# Altium PCB PCB1.PcbDoc
Units mm, origin at the board's own origin, x right, y up, seen from the top; angles counter-clockwise.
Board outline 100 x 50 mm, 2 copper layers (Top Layer, Bottom Layer); 39 components, 30 nets, 103 pads, 25 vias.
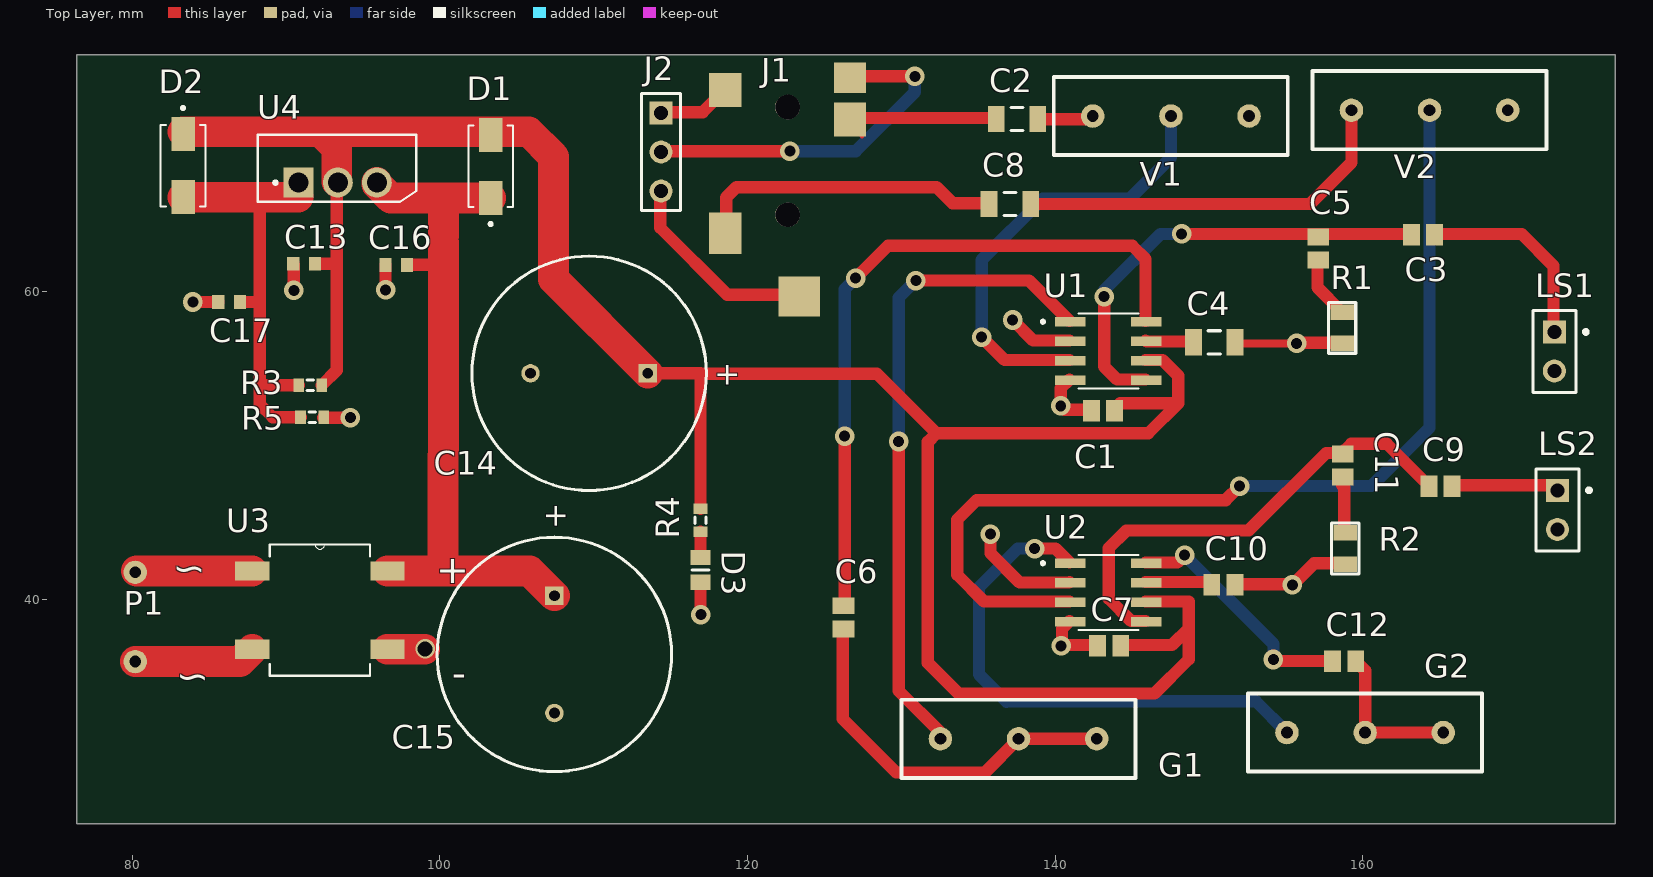
[diagram p0: Top Layer view]
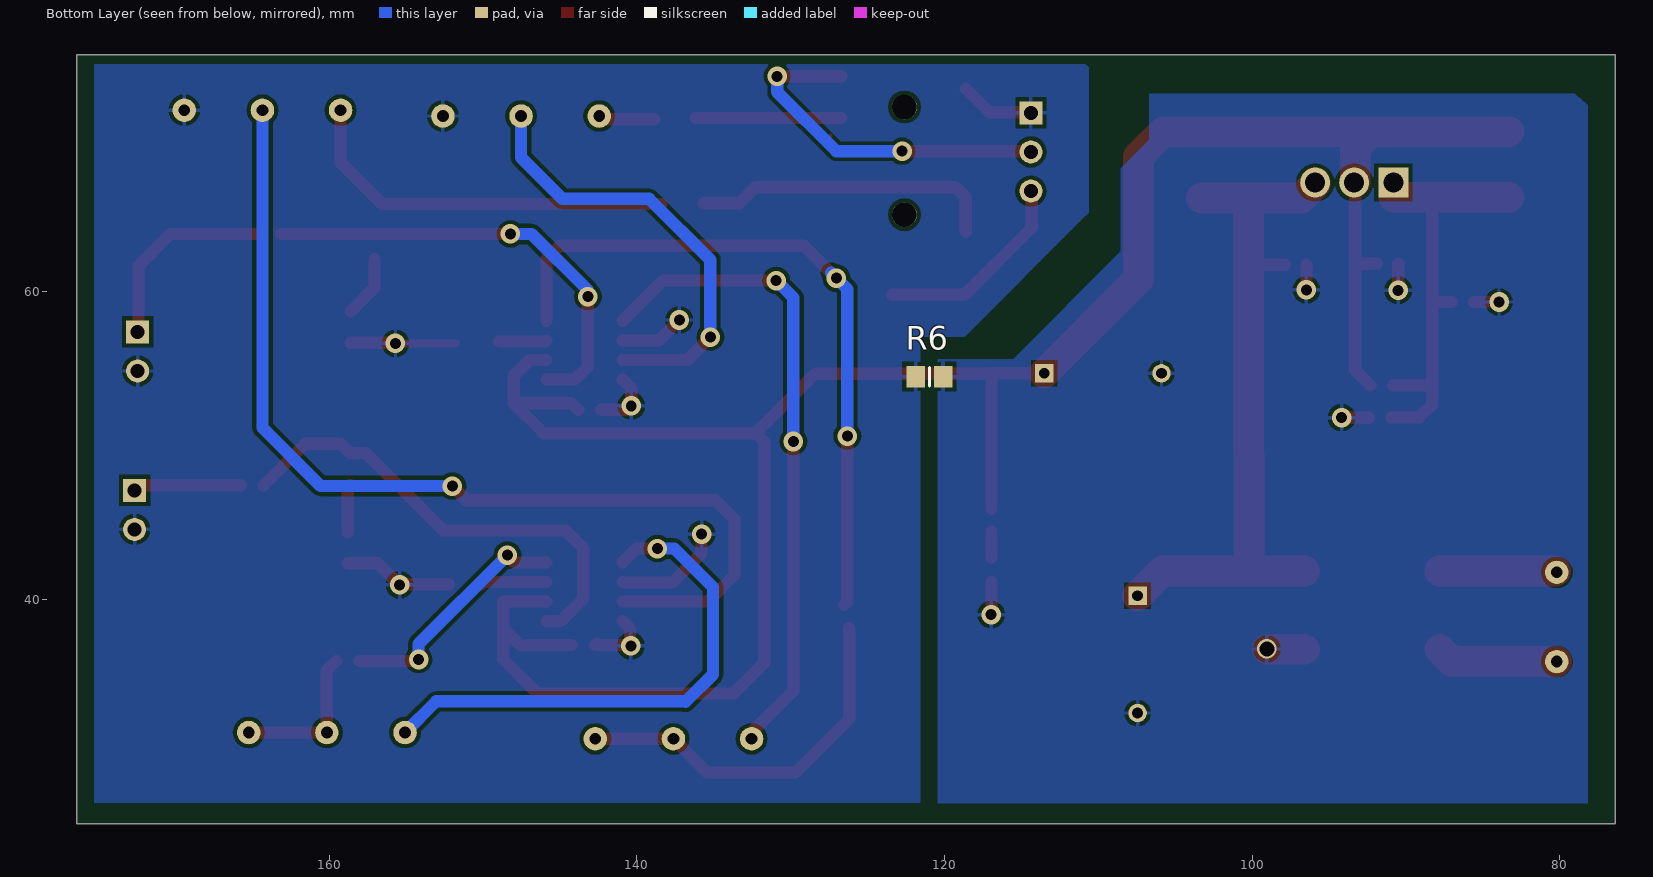
[diagram p1: Bottom Layer view, seen from below]

## Layer stack, top to bottom
Top Solder: solder mask 0.0102, Solder Resist, Dk 3.5
Top Layer: signal copper 0.0356
Dielectric 1: dielectric 0.32, FR-4, Dk 4.8
Bottom Layer: signal copper 0.0356
Bottom Solder: solder mask 0.0102, Solder Resist, Dk 3.5

## Board outline
76.4,25.4 176.4,25.4 176.4,75.4 76.4,75.4

## Design rules (kind name [scope] priority, off if disabled: settings)
Clearance Plnaes [All] p1: gap=0.254 ignorepadtopadclearanceinfootprint=FALSE except(0: Arc-Hole Track-Hole SMDPad-Hole THPad-Hole Via-Hole Fill-Hole Poly-Hole Region-Hole Text-Hole)
ComponentClearance [All] p1 off: gap=0.254 collisioncheckmode=3 verticalgap=0.254 showdistances=FALSE
PolygonConnect [All] p1: connectstyle=Relief reliefconductorwidth=0.254 reliefentries=4 polygonreliefangle="90 Angle" airgapwidth=0.254
RoutingVias [All] p1: holewidth=0.711 width=1.27 viastyle="Through Hole" minholewidth=0.711 minwidth=1.27 maxholewidth=0.711 maxwidth=1.27
SolderMaskExpansion [All] p1: expansion=0.102
UnpouredPolygon [All] p1: allowunpoured=TRUE allowshelved=TRUE
Width [All] p1: maxlimit=2 minlimit=0.5 preferedwidth=0.8 minimp=50.000000 maximp=50.000000 favimp=50.000000
28 further rules are at their usual default settings.

## Classes and differential pairs
component class Power_Supply: C1 C13 C14 C16 C17 D1 D2 D3 P1 R3 R4 R5 R6 U3 U4
component class LM386: C2 C3 C4 C5 C6 C7 C8 C9 C10 C11 C12 C17 G1 G2 J1 J2 LS1 LS2 R5 R6 U1 U2 V1 V2

## Components (designator, comment, footprint, x,y, rotation, side; value= is the part's Value field where it differs from the comment)
C1 "Cap Semi" C0805 143.104,52.273 r0 top value=100n
C2 "Cap Semi" C1206 137.516,71.222 r180 top value=220nF
C3 "Cap Pol3" C0805 163.906,63.703 r0 top value=220uF
C4 "Cap Semi" C1206 150.343,56.718 r180 top value=10uF
C5 "Cap Semi" C0805 157.099,62.814 r270 top value=47nF
C6 "Cap Semi" C0805 126.238,38.837 r270 top value=10uF
C7 "Cap Semi" C0805 143.51,36.982 r0 top value=100n
C8 "Cap Semi" C1206 137.058,65.71 r180 top value=220nF
C9 "Cap Pol3" C0805 165.049,47.371 r0 top value=220uF
C10 "Cap Semi" C0805 150.927,40.945 r180 top value=10uF
C11 "Cap Semi" C0805 158.699,48.717 r270 top value=47nF
C12 "Cap Semi" C0805 158.787,35.992 r0 top value=10uF
C13 "Cap Semi" 1608[0603] 91.175,61.824 r0 top value=1uF
C14 "Cap Pol1" RB7.6-15 109.7,54.7 r0 top value=1000uF/35V
C15 "Cap Pol1" RB7.6-15 107.442,36.424 r90 top value=1000uF/35V
C16 "Cap Semi" 1608[0603] 97.166,61.747 r0 top value=0.1uF
C17 "Cap Semi" 1608[0603] 86.298,59.334 r0 top value=10uF
D1 "S1BB-13-F" DIOM505270X240 103.3,68.15 r90 top
D2 "S1BB-13-F" DIOM505270X240 83.3,68.2 r270 top
D3 "LED3" 6-0805_L 116.942,41.923 r270 top
G1 "RPot" "PCBComponent_1 - duplicate" 142.697,30.937 r180 top value=10K
G2 "RPot" "PCBComponent_1 - duplicate" 165.227,31.344 r180 top value=10K
J1 "35RASMT4BHNTRX" SWITCHCRAFT_35RASMT4BHNTRX 122.606,68.259 r270 top
J2 "Header 3" HDR1X3 114.376,71.628 r270 top
LS1 "Speaker" PIN2 172.451,57.389 r270 top
LS2 "Speaker" PIN2 172.651,47.089 r270 top
P1 "External Trafo Used" PCBComponent_1 80.188,35.958 r90 top
R1 "Res3" SMD-0805-RES 158.648,57.658 r180 top value=10
R2 "Res3" SMD-0805-RES 158.852,43.307 r180 top value=10
R3 "Res1" J1-0603 91.567,53.924 r180 top value=1K
R4 "Res3" J1-0603 116.942,45.149 r270 top value=1K
R5 "Res3" J1-0603 91.694,51.841 r180 top value=6.2K
R6 "Res3" 6-0805_N 120.98,54.483 r180 bottom value=0
U1 "LM386M-1/NOPB" SOIC127P600X175-8N 143.451,56.149 r0 top
U2 "LM386M-1/NOPB" SOIC127P600X175-8N 143.451,40.449 r0 top
U3 "DF01S2" SOT508P985X260-4N 92.2,39.3 r180 top
U4 "LM317T" TO254P460X1020X1945-3P 93.36,67.049 r90 top
V1 "RPot" "PCBComponent_1 - duplicate" 152.603,71.425 r180 top value=10K
V2 "RPot" "PCBComponent_1 - duplicate" 169.418,71.806 r180 top value=10K

## Footprints (in the part's own frame and the unit in brackets; to place one, negate y for a bottom-side part, rotate by r counter-clockwise, add the part's x,y. Pads: shape width x height; smd on the part's side, far side on the other; paste and mask are expansions set on the pad)
6-0805_L [mm] "Chip Resistor, Body 2.0x1.2mm, IPC High Density"
  rect 1x1.3 smd: 1(-0.8,0) 2(0.8,0)
  silkscreen extent 0,-0.55 0,0.55, body extent -1.07,-0.7 1.07,0.7, height 0.7
6-0805_N [mm] "Chip Resistor, Body 2.0x1.2mm, IPC Medium Density"
  rect 1.2x1.4 smd: 1(-0.9,0) 2(0.9,0)
  silkscreen extent 0,-0.6 0,0.6, body extent -1.07,-0.7 1.07,0.7, height 0.7
1608[0603] [mm] "Chip Capacitor, Body 1.6x0.8mm, IPC High Density"
  rect 0.8x0.9 smd: 1(-0.7,0) 2(0.7,0)
  body extent -0.87,-0.48 0.87,0.48, height 1.3
C0805 [mm] "Chip Capacitor, Body 2.0x1.3mm, IPC High Density"
  rect 1.1x1.4 smd: 1(-0.75,0) 2(0.75,0)
  body extent -1.1,-0.72 1.1,0.72, height 1.4
C1206 [mm] "Chip Capacitor, Body 3.2x1.6mm, IPC High Density"
  rect 1.1x1.7 smd: 1(-1.35,0) 2(1.35,0)
  silkscreen extent -0.4,-0.75 0.4,0.75, body extent -1.7,-0.9 1.7,0.9, height 1.3
DIOM505270X240 [mm]
  rect 2.21x1.53 smd: A(2.05,0) C(-2.05,0)
  silkscreen extent -3.85,-1.45 2.65,1.45
HDR1X3 [mm] "Connector; Header; 3 Position"
  rect 1.5x1.5 hole 0.9: 1(0,0)
  round 1.5 hole 0.9: 2(2.54,0) 3(5.08,0)
  silkscreen extent -1.27,-1.27 6.35,1.27
J1-0603 [mm] "Chip Resistor, Body 1.6x0.8mm, IPC High Density"
  rect 0.7x0.9 smd: 1(-0.75,0) 2(0.75,0)
  silkscreen extent -0.2,-0.35 0.2,0.35, body extent -0.85,-0.48 0.85,0.48, height 0.9
PCBComponent_1 [mil]
  round 60 hole 30: 1(0,0) 2(228.35,0)
"PCBComponent_1 - duplicate" [mil]
  round 60 hole 30: 1(0,0) 2(200,0) 3(400,0)
  silkscreen extent -99,-100 500,100
PIN2 [mm] "Photosensitive Diode; 2 Leads"
  rect 1.5x1.5 hole 0.9: 1(0,0)
  round 1.5 hole 0.9: 2(2.54,0)
  silkscreen extent -1.4,-1.4 3.94,2.18
RB7.6-15 [mm] "Polarized Capacitor (Radial); 2 Leads"
  rect 1.2x1.2 hole 0.7: 1(3.81,0)
  round 1.2 hole 0.7: 2(-3.81,0)
  silkscreen extent -7.62,-7.62 7.62,7.62
SMD-0805-RES [mil]
  rect 60x40 smd: 1(0,40) 2(0,-40)
  silkscreen extent -35,-65 35,65, body extent -24,-39 26,39, height 31
SOIC127P600X175-8N [mm]
  rect 1.97x0.6 smd: 1(-2.475,1.905) 2(-2.475,0.635) 3(-2.475,-0.635) 4(-2.475,-1.905) 5(2.475,-1.905) 6(2.475,-0.635) 7(2.475,0.635) 8(2.475,1.905)
  silkscreen extent -4.35,-2.45 1.95,2.45
SOT508P985X260-4N [mil]
  rect 88x49 smd: 1(-173,-100) 2(-173,100) 3(173,100) 4(173,-100)
  silkscreen extent -128,-168 128,168
SWITCHCRAFT_35RASMT4BHNTRX [mm]
  rect 2.2x2.1 smd: 1(-4.85,-4.05) 2(-2.95,4.05)
  rect 2.7x2.1 smd: 3(4.45,-4.048)
  rect 2x2.1 smd: 4(-5.65,4.05)
  rect 2.6x2.7 smd: 5(8.553,0.748)
  round 1.6 hole 1.6 unplated: None(-3.75,0) None(3.25,0)
TO254P460X1020X1945-3P [mm]
  rect 1.95x1.95 hole 1.3: 1(0.051,2.54)
  round 1.95 hole 1.3: 2(0.051,0) 3(0.051,-2.54)
  silkscreen extent -1.2,-5.1 3.15,5.21

## Part data
C1 C2 C4 C5 C6 C7 C8 C10 C11 C12 C13 C16 C17: "Capacitor (Semiconductor SIM Model)", LatestRevisionDate=29-May-2009, LatestRevisionNote="IPC-7351 Footprint Added.", PackageDescription="Chip Capacitor", Published=8-Jun-2000, Publisher="Altium Limited"
  C1 C5 C7 C11: PackageReference=C1206, PN=C0805C473K3RACTU
  C2 C8: PackageReference=C1206, PN=C0805C223K3RACTU
  C4 C6 C12 C13 C16 C17: PackageReference=C1206
  C10: PackageReference=C0805, PN=GRM32DR71E106KA12L
C3 C9: "Polarized Capacitor (Surface Mount)", LatestRevisionDate=29-May-2009, LatestRevisionNote="IPC-7351 Footprint Added.", PackageDescription="Chip Capacitor", PackageReference=C0805, Published=8-Jun-2000, Publisher="Altium Limited"
C14 C15: "Polarized Capacitor (Radial)", LatestRevisionDate=17-Jul-2002, LatestRevisionNote="Re-released for DXP Platform.", PackageDescription="Polarized Capacitor (Radial); 2 Leads", PackageReference=RB7.6-15, PN=EEU-FS1V102LB, Published=8-Jun-2000, Publisher="Altium Limited"
D1 D2: library part "Diode 1N4002", "100V 1 Amp General Purpose Rectifier", Supplier Part Number 1=621-S1BB-F, Code_JEDEC=DO-204-AL, ComponentLink1Description="Manufacturer Link", ComponentLink1URL=http://www.fairchildsemi.com/, ComponentLink2Description=Datasheet, ComponentLink2URL=http://www.fairchildsemi.com/ds/1N%2F1N4001.pdf, DatasheetVersion=1998, LatestRevisionDate=17-Jul-2002, LatestRevisionNote="Re-released for DXP Platform.", PackageDescription="Diode, Axial; Body 5.2 x 2.7 mm (LxDia. max), Lead Dia. 0.86 mm (max)", PackageReference=DO-41, PackageVersion=Aug-1999, Published=8-Jun-2000, Publisher="Altium Limited", Supplier 1=Mouser
D3: "Typical BLUE SiC LED", DatasheetVersion=16-Apr-2002, LatestRevisionDate=17-Dec-2003, LatestRevisionNote="PCB Footprint replaced.", PackageDescription="SM LED; 2 C-Bend Leads; Body 3.5 x 2.8 x 1.9 mm, inc leads (LxWxH typ)", PackageReference=3.5X2.8X1.9, PackageVersion=16-Apr-2002, PN=SML-H12U8TT86C, Published=8-Jun-2000, Publisher="Altium Limited"
G1 G2 V1 V2: "Potentiometer", LatestRevisionDate=17-Jul-2002, LatestRevisionNote="Re-released for DXP Platform.", PackageDescription="Variable Resistor, Thru-Hole; 3 Leads", PackageReference=VR5, Published=8-Jun-2000, Publisher="Altium Limited", Set Position=0.5, Sim Note="Enter the Resistance value and the set point into parameter fields."
J1: "Conn 3.5MM Stereo Jack F 3 POS Solder RA SMD 5 Terminal 1 Port T/R", Package=None, Supplier Part Number 1=7051490, Availability=Unavailable, MF=Switchcraft, MP=35RASMT4BHNTRX, Price=None, SnapEDA_Link=https://www.snapeda.com/parts/35RASMT4BHNTRX/Switchcraft%20Inc./view-part/?ref=snap, Supplier 1=RSComponents
J2: "Header, 3-Pin", LatestRevisionDate=17-Jul-2002, LatestRevisionNote="Re-released for DXP Platform.", Publisher="Altium Limited"
LS1 LS2: "Loudspeaker", LatestRevisionDate=17-Jul-2002, LatestRevisionNote="Re-released for DXP Platform.", PackageReference=PIN2, Published=24-Mar-1999, Publisher="Altium Limited"
P1: library part MHDR1X2, "Header, 2-Pin", LatestRevisionDate=17-Jul-2002, LatestRevisionNote="Re-released for DXP Platform.", Publisher="Altium Limited"
R1 R2 R3 R4 R5 R6: "Resistor", Published=8-Jun-2000, Publisher="Altium Limited"
  R1 R2 R4 R5 R6: LatestRevisionDate=29-May-2009, LatestRevisionNote="IPC-7351 Footprint Added.", PackageDescription="Chip Resistor", PackageReference=J1-0603
  R3: LatestRevisionDate=17-Jul-2002, LatestRevisionNote="Re-released for DXP Platform.", PackageDescription="Axial Device, Thru-Hole; 2 Leads; 0.3 in Pin Spacing", PackageReference=AXIAL-0.3
U1 U2: "Wide Input Voltage Low Power Audio Amplifier with Internal Gain 8-SOIC 0 to 70", Package="SOIC-8 Texas Instruments", Supplier Part Number 1=536-1366, Availability=Good, MF="Texas Instruments", MP=LM386M-1, Price="0.76 USD", SnapEDA_Link=https://www.snapeda.com/parts/LM386M-1/Texas%20Instruments/view-part/?ref=snap, Supplier 1=RSComponents
U3: library part DF01S, "DF01S Series 1.5 A 100 V 5 uA Surface Mount Bridge Rectifier -SDIP-4", Package="SMD-4 ON Semiconductor", Digi-Key_Part_Number=DF01SDI-ND, Digi-Key_Purchase_URL=https://www.digikey.es/product-detail/en/diodes-incorporated/DF01S/DF01SDI-ND/149499?utm_source=snapeda&utm_medium=aggregator&utm_campaign=symbol, MF="ON Semiconductor", MP=DF01S, SnapEDA_Link=https://www.snapeda.com/parts/DF01S/ON%20Semiconductor/view-part/?ref=snap
U4: Package="TO-220-3 HTC Korea", Availability=Unavailable, MF="Texas Instruments", MP=LM317T, Price=None, SnapEDA_Link=https://www.snapeda.com/parts/LM317T/Texas%20Instruments/view-part/?ref=snap

## Via types
v1: diameter 1.27, hole 0.711, Top Layer to Bottom Layer, 24 vias
v2: diameter 1.27, hole 1, Top Layer to Bottom Layer, 1 vias

## Nets (pads, with @x,y where several pads share a name; then routed paths per layer and width w, separated by ;. In a path a pad name is that pad's centre, name@x,y a point inside that pad or via, vN(x,y) a via of type N, cw(c..) or ccw(c..) an arc to the next point about the centre after c; other vN are vias at no path point)
9V: C1.2 C7.2 C13.2 C14.1 D1.A D2.C R3.1 R4.1 U1.6 U2.6 U4.2 | length 160.3
  Top Layer w0: 93.249,63.271 93.3,63.322
  Top Layer w0.254: D2.C D2.C@83.3,70.4 ; 93.3,70.1 93.4,70.2
  Top Layer w0.8: C13.2 93.249,61.824 93.3,61.874 ; R3.1 93.3,54.907 93.3,61.874 ; U4.2@93.3,67.16 93.3,63.322 93.3,61.874 ; C14.1 116.916,54.7 ; R4.1 116.942,54.675 128.409,54.675 132.283,50.8 ; C1.2@143.803,52.324 144.235,52.756 148.006,52.756 ; C7.2@144.209,37.033 147.587,37.033 148.679,38.125 ; U2.6@145.875,39.865 148.679,39.865 148.679,38.125 ; U1.6@145.875,55.565 146.975,55.565 148.006,54.534 148.006,52.756 ; 148.679,36.093 148.679,36.106 ; 132.283,50.8 131.724,50.241 131.724,35.865 133.706,33.884 146.456,33.884 148.679,36.106 ; 132.283,50.8 146.05,50.8 148.006,52.756 ; 148.679,36.106 148.679,38.125
  Top Layer w2: D2.C@83.3,70.4 92.228,70.4 ; U4.2@93.3,67.16 93.3,69.328 92.228,70.4 ; C14.1 107.391,60.819 107.391,68.783 105.774,70.4 103.1,70.4 92.228,70.4
"230 -18": P1.2 U3.4 | length 7.7
  Top Layer w0.254: P1.2 P1.2@80.27,41.84
  Top Layer w2: P1.2@80.27,41.84 U3.4
Ajuste: C17.2 D2.A R3.2 R5.2 U4.1 | length 28.8
  Top Layer w0.254: D2.A@83,66.2 83.1,66.2 83.15,66.15 D2.A ; 90.3,65.68 U4.1@90.77,66.15
  Top Layer w0.8: C17.2 88.279,59.334 ; 88.29,59.346 88.279,59.334 ; 88.367,66.15 88.279,66.063 88.279,59.334 ; R3.2 88.305,53.924 88.279,53.899 ; R5.2 89.129,51.841 88.279,52.691 88.279,53.899 ; 88.279,53.899 88.279,59.334
  Top Layer w2: D2.A 88.367,66.15 U4.1@90.77,66.15
Derecha: C2.2 J1.2 | length 9.5
  Top Layer w0.254: J1.2@127.4,70.15 127.45,70.1
  Top Layer w0.8: J1.2@126.707,71.301 C2.2@136.166,71.301
GND-ANA: C1.1 C4.1 C7.1 C10.1 J1.1 J2.1 LS1.2 LS2.2 R1.1 R2.1 R6.1 U1.2 U1.4 U2.2 U2.4 V1.1 V2.1 | length 38.7
  Top Layer w0.254: C4.1@151.642,56.769 C4.1@151.769,56.642 ; v1@155.372,40.996 v1(155.423,40.945)
  Top Layer w0.5: C4.1@151.769,56.642 v1@155.6,56.642
  Top Layer w0.8: J2.1@114.325,71.679 117.084,71.679 J1.1@118.607,73.201 ; v1(135.788,44.247) 135.788,43.002 137.687,41.104 140.894,41.104 U2.2@140.925,41.135 ; v1(137.236,58.166) 138.567,56.835 U1.2@140.925,56.835 ; U2.4@140.925,38.595 140.437,38.107 140.437,37.033 142.709,37.033 C7.1@142.604,37.138 ; U1.4@140.925,54.295 140.36,53.73 v1(140.36,52.578) 140.614,52.324 C1.1@142.303,52.324 ; C10.1@152.226,40.996 v1@155.372,40.996 ; v1(155.423,40.945) 156.82,42.342 R2.1@158.801,42.342 ; v1@155.6,56.642 155.651,56.693 R1.1@158.598,56.693
  other v1: 140.386,36.982 155.69,56.642
GND-PWR: C13.1 C14.2 C15.2 C16.1 C17.1 D3.2 R5.1 R6.2 U3.2 | length 11.4
  Top Layer w0: v2@99.015,36.76 v2(99.035,36.779)
  Top Layer w0.8: v1(83.947,59.334) C17.1 ; C13.1 90.5,61.798 v1(90.5,60.096) ; R5.1 92.419,51.816 v1(94.183,51.816) ; v1(96.466,60.122) C16.1 ; D3.2 116.942,39.04 v1(116.967,39.014)
  Top Layer w2: U3.2 v2@99.015,36.76
Izquierda: C8.2 J1.3 | length 20
  Top Layer w0.8: J1.3@118.609,63.901 118.609,66.132 119.278,66.802 132.283,66.802 133.325,65.761 C8.2@135.658,65.761
NetC2_1: C2.1 V1.3 | length 3.7
  Top Layer w0.8: C2.1 142.24,71.222 V1.3
NetC3_1: C3.1 C5.1 U1.5 | length 29.4
  Top Layer w0.8: v1(143.18,59.69) 143.18,55.143 144.028,54.295 U1.5@145.875,54.295 ; v1(148.213,63.758) 157.048,63.758 157.052,63.754 C3.1@163.105,63.754
  Bottom Layer w0.8: v1(143.18,59.69) 143.18,60.096 146.841,63.758 v1(148.213,63.758)
NetC3_2: C3.2 LS1.1 | length 12.9
  Top Layer w0.8: C3.2@164.605,63.754 170.332,63.754 172.4,61.686 LS1.1@172.4,57.44
NetC4_2: C4.2 U1.7 | length 3.2
  Top Layer w0.254: C4.2@148.876,56.835 C4.2@148.942,56.769
  Top Layer w0.8: U1.7@145.875,56.835 145.941,56.769 C4.2@148.942,56.769
NetC5_2: C5.2 R1.2 | length 4
  Top Layer w0.8: C5.2@157.048,62.115 157.048,60.274 R1.2@158.598,58.725
NetC6_1: C6.1 U1.8 | length 46.2
  Top Layer w0.8: v1(126.314,50.622) 126.314,39.841 C6.1@126.517,39.637 ; v1(127.025,60.884) 129.134,62.992 145.009,62.992 145.875,62.126 U1.8@145.875,58.105
  Bottom Layer w0.8: v1(126.314,50.622) 126.314,60.173 v1(127.025,60.884) v1@127.381,61.239
NetC6_2: C6.2 G1.1 G1.2 | length 24.8
  Top Layer w0.8: C6.2@126.187,38.137 126.187,32.233 129.667,28.753 135.433,28.753 G1.2 G1.1
NetC8_1: C8.1 V2.3 | length 25.4
  Top Layer w0.8: C8.1 156.566,65.71 159.258,68.402 V2.3
NetC9_1: C9.1 C11.1 U2.5 | length 31
  Top Layer w0.8: U2.5@145.875,38.595 144.935,38.595 143.485,40.046 143.485,43.332 144.628,44.475 152.578,44.475 157.62,49.518 158.648,49.518 159.248,50.118 161.552,50.118 C9.1@164.248,47.422
NetC9_2: C9.2 LS2.1 | length 7
  Top Layer w0.8: C9.2@165.748,47.422 172.318,47.422 LS2.1@172.6,47.14
NetC10_2: C10.2 U2.7 | length 4.3
  Top Layer w0.8: U2.7@145.875,41.135 149.987,41.135 C10.2@150.126,40.996
NetC11_2: C11.2 R2.2 | length 3.1
  Top Layer w0.8: C11.2@158.648,47.418 158.801,47.266 R2.2@158.801,44.374
NetC12_1: C12.1 U2.8 | length 16.1
  Top Layer w0.8: U2.8@145.875,42.405 147.942,42.405 v1(148.412,42.875) ; v1@154.19,36.335 v1(154.19,36.093) 154.19,35.992 C12.1
  Bottom Layer w0.8: v1(148.412,42.875) 154.19,37.097 v1(154.19,36.093)
NetC12_2: C12.2 G2.1 G2.2 | length 10
  Top Layer w0.8: C12.2 160.147,35.382 G2.2 G2.1
NetC15_1: C15.1 C16.2 D1.C U3.1 U4.3 | length 46
  Top Layer w0.8: C16.2 99.692,61.747 ; 99.619,62.586 100.225,63.192
  Top Layer w2: U4.3 95.9,66.99 96.799,66.091 100.225,66.091 100.225,66.021 ; U3.1 100.33,41.84 ; 100.225,63.192 100.225,57.099 100.2,41.97 100.33,41.84 ; 100.225,63.627 100.225,66.021 ; D1.C 100.305,66.1 100.225,66.021 ; C15.1 105.836,41.84 100.33,41.84
NetD3_1: D3.1 R4.2 | length 1.7
  Top Layer w0.8: D3.1 R4.2
NetG1_2: G1.3 U1.1 | length 42.5
  Top Layer w0.8: v1(129.819,50.267) 129.819,34.061 132.537,31.344 G1.3 ; v1(130.937,60.731) 138.299,60.731 ; 138.303,60.731 138.299,60.731 ; U1.1@140.925,58.105 138.299,60.731
  Bottom Layer w0.8: v1(129.819,50.267) 129.819,59.614 v1(130.937,60.731)
NetG2_2: G2.3 U2.1 | length 34.6
  Top Layer w0.8: v1(138.659,43.307) 140.023,43.307 U2.1@140.925,42.405
  Bottom Layer w0.8: v1(138.659,43.307) 137.566,43.307 135.052,40.792 135.052,35.128 136.83,33.35 136.855,33.376 153.035,33.376 G2.3
NetJ1_4: J1.4 J2.2 | length 23.3
  Top Layer w0.8: J2.2@114.325,69.139 v1(122.758,69.139) ; J1.4@126.707,74.001 v1(130.875,74.001)
  Bottom Layer w0.8: v1(122.758,69.139) 127.025,69.139 130.875,72.988 v1(130.875,74.001)
NetJ1_5: J1.5 J2.3 | length 13.3
  Top Layer w0.8: J2.3@114.325,66.599 114.325,64.16 118.687,59.799 J1.5@123.405,59.799
NetP1_1: P1.1 U3.3 | length 8
  Top Layer w2: P1.1 87.003,35.958 U3.3
NetU1_3: U1.3 V1.2 | length 29.1
  Top Layer w0.8: v1(135.22,57.058) 136.713,55.565 U1.3@140.925,55.565
  Bottom Layer w0.8: v1(135.22,57.058) 135.22,62.068 139.192,66.04 144.831,66.04 147.523,68.732 V1.2
NetU2_3: U2.3 V2.2 | length 65.4
  Top Layer w0.8: U2.3@140.925,39.865 135.37,39.865 133.629,41.605 133.629,45.187 134.899,46.457 151.079,46.457 v1(151.994,47.371)
  Bottom Layer w0.8: v1(151.994,47.371) 160.553,47.371 164.338,51.156 V2.2
pads on no net: J1.None

## Polygon pours and split planes (outlines as drawn)
GND-ANA on Bottom Layer "Bottom Layer-GND" (solid, pour order 18): 121.564,26.772 121.564,57.074 118.694,57.074 110.998,64.77 110.617,65.151 110.617,74.041 110.617,74.524 110.592,74.549 110.846,74.803 175.26,74.803 175.26,27.762 175.26,26.772
GND-PWR on Bottom Layer "Bottom Layer-GND 1" (solid, pour order 16): 78.737,72.593 79.016,72.873 106.677,72.873 106.677,69.875 108.531,68.021 108.531,62.636 115.542,55.626 120.421,55.626 120.421,26.746 119.936,26.746 78.178,26.746 78.178,72.111 78.839,72.771
no net on Bottom Layer "Bottom Layer-No Net 2" (solid, pour order 20): 113.055,28.169
no net on Bottom Layer "Bottom Layer-No Net" (solid, pour order 10): 78.588,58.572
no net on Bottom Layer "Bottom Layer-No Net 1" (solid, pour order 6): 77.1,26.5

## Silkscreen, mask and mechanical layers (free items; w line width, h text height)
Mechanical 1:
  lines w0.254: 76.403,25.4 176.403,25.4 176.403,75.413 76.403,75.413 76.403,25.4

## Text inside footprints (layer, text, board x,y; h text height)
C14: Top Overlay "+" at 117.832,53.963 h1.5
C15: Top Overlay "+" at 108.179,44.555 h1.5 r90
U3: Top Overlay "~" at 85.003,34.129 h1.88; Top Overlay "~" at 84.766,41.159 h1.88; Top Overlay "-" at 101.724,34.339 h1.88; Top Overlay "+" at 101.899,41.051 h1.88; Mechanical 1 "~" at 85.061,34.136 h1.88; Mechanical 1 "~" at 84.764,41.229 h1.88; Mechanical 1 "-" at 101.865,34.234 h1.88; Mechanical 1 "+" at 101.793,40.962 h1.88